# Altium PCB dcdc.PcbDoc
Units mil, origin at the board's own origin, x right, y up, seen from the top; angles counter-clockwise.
Board outline 1910 x 1465 mil, 2 copper layers (Top Layer, Bottom Layer); 30 components, 14 nets, 84 pads, 15 vias.
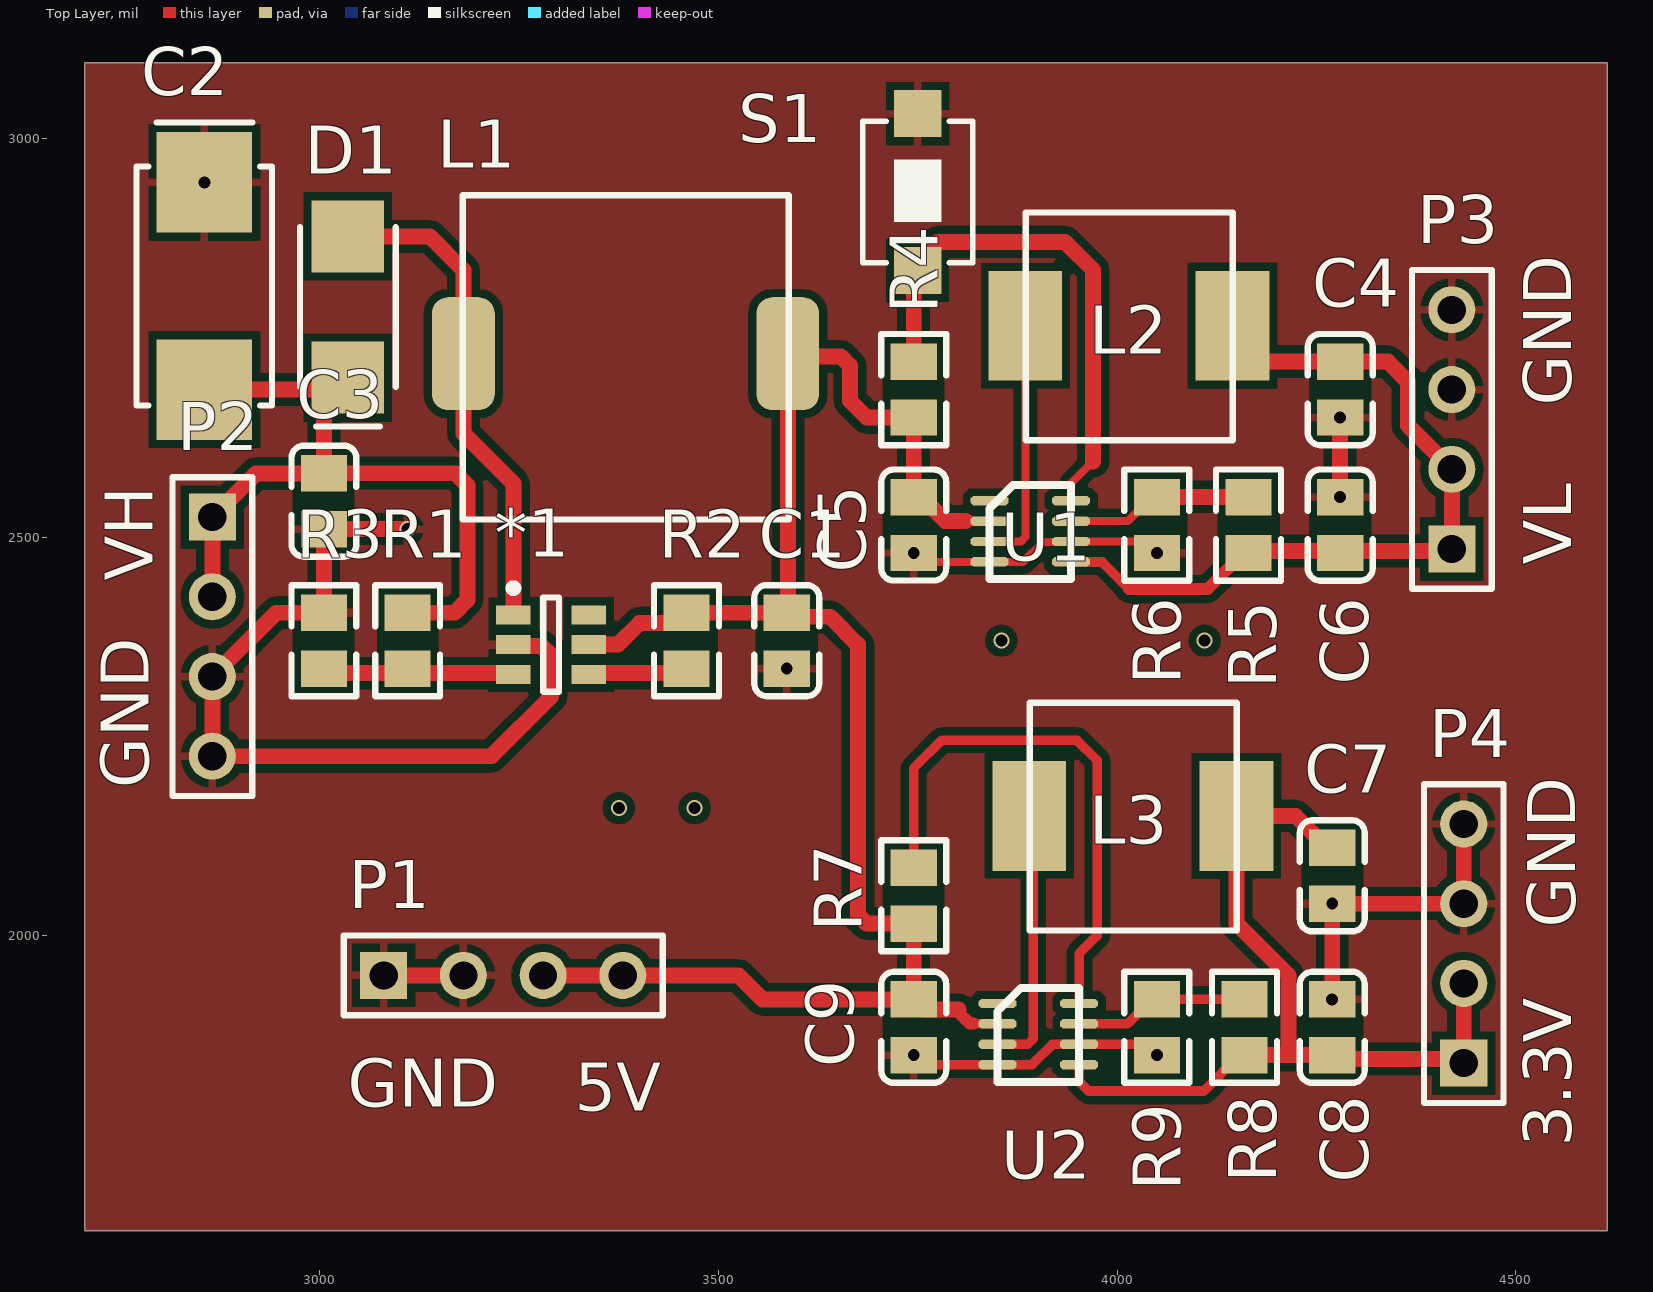
[diagram p0: Top Layer view]
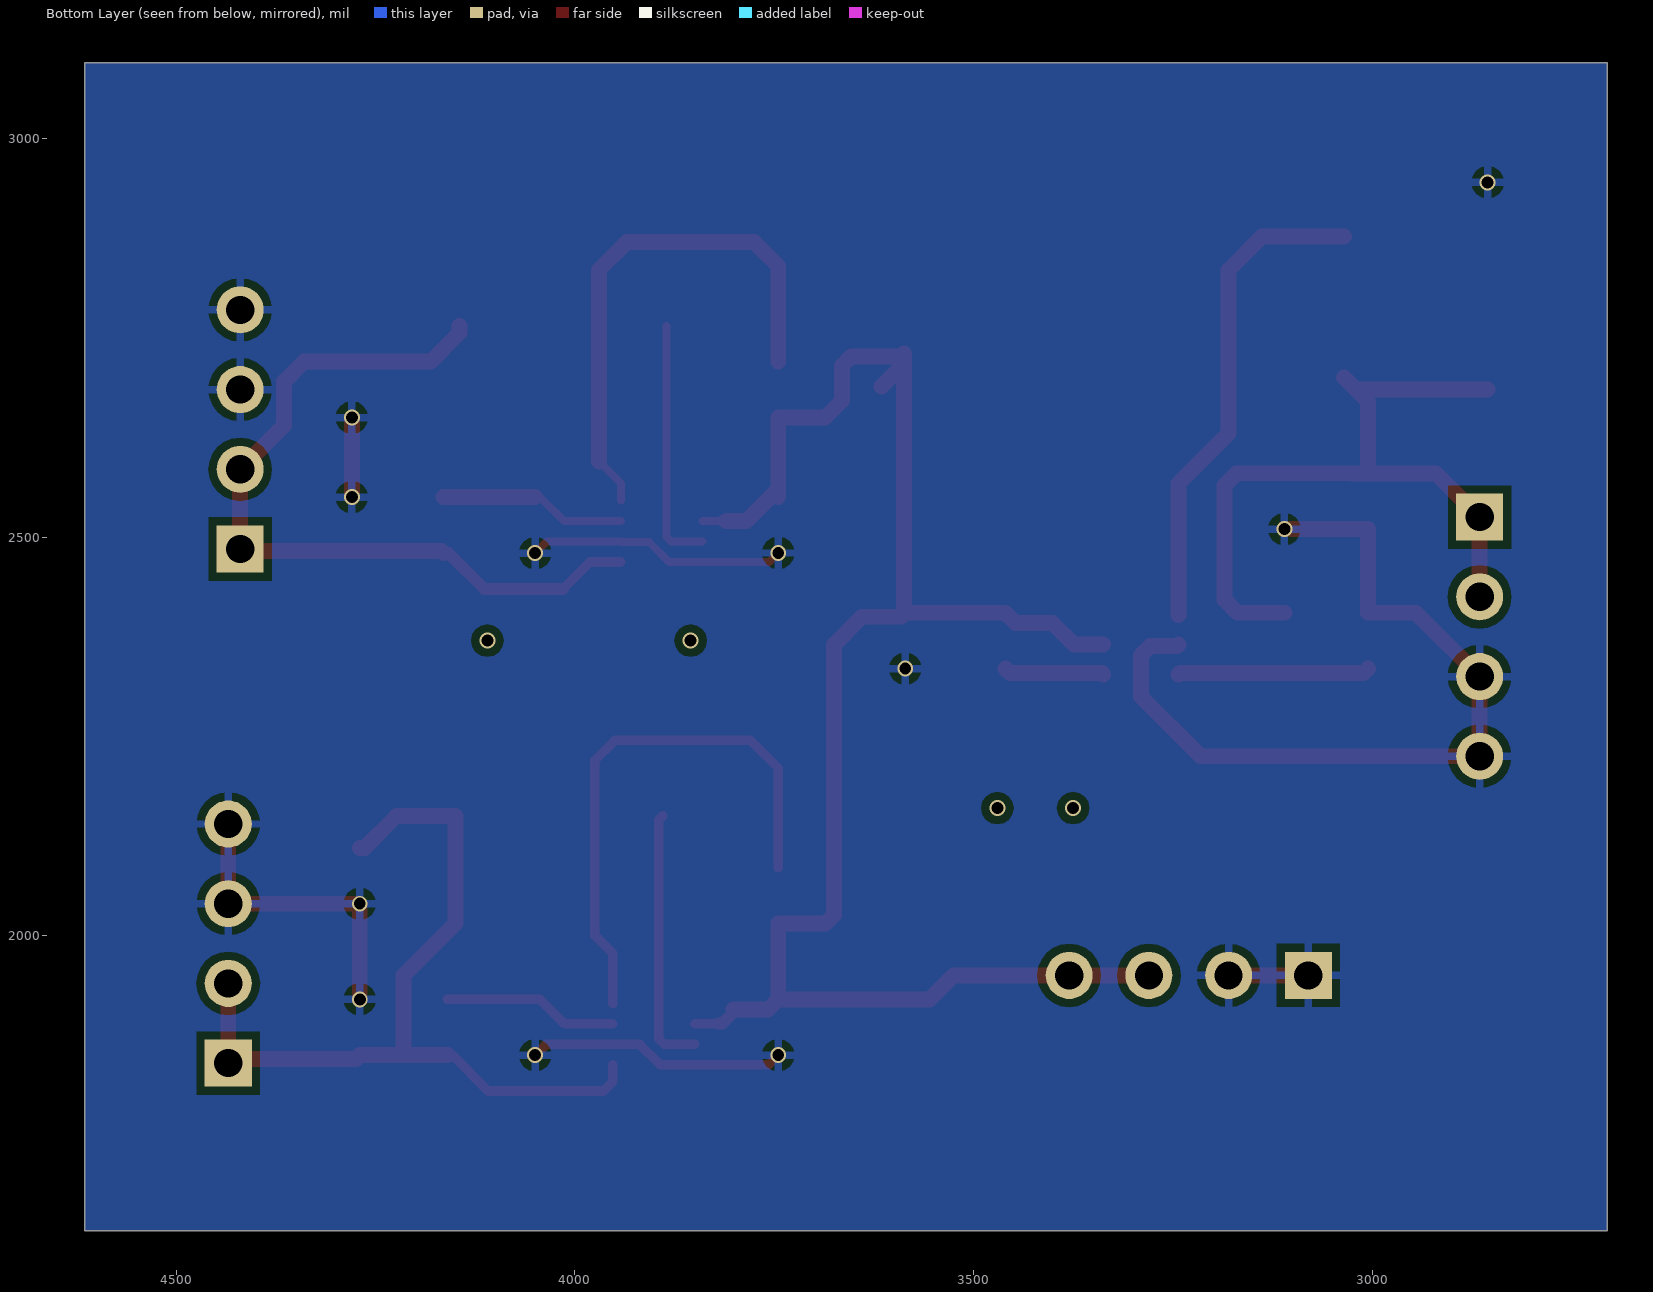
[diagram p1: Bottom Layer view, seen from below]
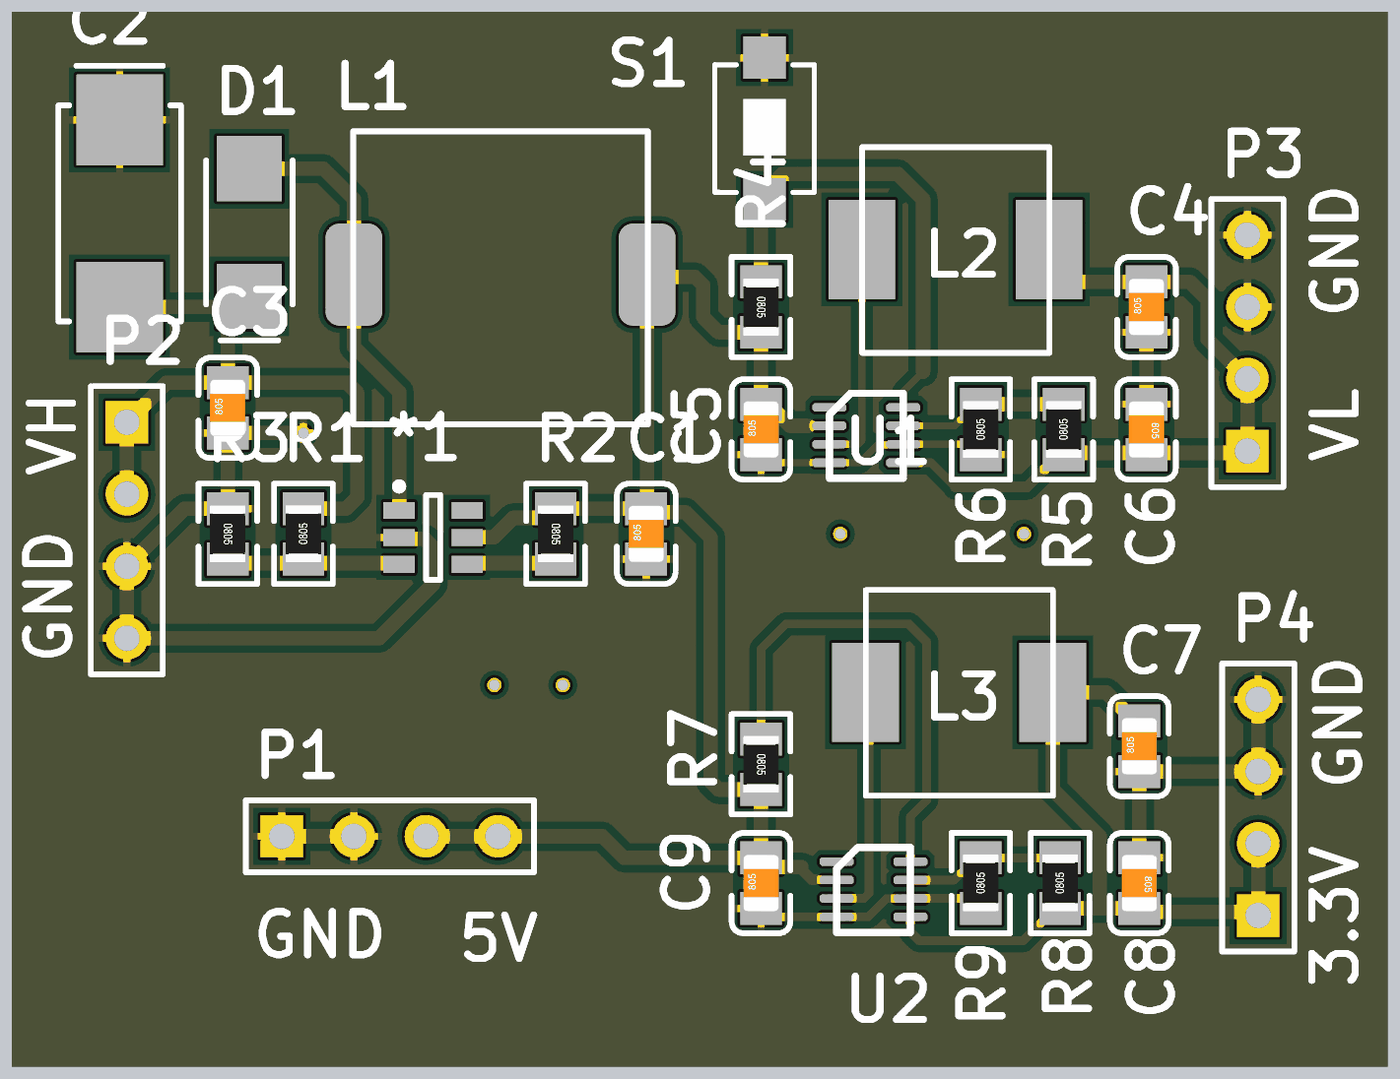
[diagram p2: 3D render of the assembled board from above, using the file's embedded part models]

## Layer stack, top to bottom
Top Solder: solder mask 0.4, Solder Resist, Dk 3.5
Top Layer: signal copper 1.4
Dielectric 1: dielectric 12.6, FR-4, Dk 4.8
Bottom Layer: signal copper 1.4
Bottom Solder: solder mask 0.4, Solder Resist, Dk 3.5

## Board outline
2705,1630 2705,3095 4615,3095 4615,1630

## Design rules (kind name [scope] priority, off if disabled: settings)
Clearance [All] p1: gap=10 ignorepadtopadclearanceinfootprint=FALSE except(0: Arc-Hole Track-Hole SMDPad-Hole THPad-Hole Via-Hole Fill-Hole Poly-Hole Region-Hole Text-Hole)
PolygonConnect [All] p1: connectstyle=Relief reliefconductorwidth=10 reliefentries=4 polygonreliefangle="90 Angle" airgapwidth=10
RoutingVias [All] p1: holewidth=28 width=50 viastyle="Through Hole" minholewidth=28 minwidth=50 maxholewidth=28 maxwidth=50
SolderMaskExpansion [All] p1: expansion=4
Width [All] p1: maxlimit=50 minlimit=10 preferedwidth=10
30 further rules are at their usual default settings.

## Components (designator, comment, footprint, x,y, rotation, side; value= is the part's Value field where it differs from the comment)
*1 "SX1308" SOT23-6 3290,2365 r0 top
C1 "22uF (226)" 0805_C 3585.68,2370 r90 top
C2 "22uF (226)" CAP-7343 2855,2815 r270 top
C3 "15pF/50V" 0805_C 3005,2545 r90 top
C4 "0.1uF" 0805_C 4280,2685 r90 top
C5 "10uF" 0805_C 3745,2515.04 r90 top
C6 "10uF" 0805_C 4280,2515 r270 top
C7 "10uF" 0805_C 4270,2075 r90 top
C8 "0.1uF" 0805_C 4270,1885 r270 top
C9 "10uF" 0805_C 3745,1885 r90 top
D1 "US1M" DIODE-SMA 3035,2877.16 r270 top
L1 "6.8uH" CDRH104R 3588,2929 r270 top
L2 "1uH" 06030 3885.39,2906.73 r0 top
L3 "1uH" 06030 3890.39,2291.73 r0 top
P1 "Header 4" HDR4X1_A 3080,1950 r0 top
P2 "Header 4" HDR4X1_A 2865,2525 r270 top
P3 "Header 4" HDR4X1_A 4420,2485 r90 top
P4 "Header 4" HDR4X1_A 4435,1840 r90 top
R1 "390KΩ" 0805_R 3110,2370 r90 top
R2 "499KΩ" 0805_R 3460,2370 r270 top
R3 "10KΩ" 0805_R 3005,2370 r270 top
R4 "499KΩ" 0805_R 3745,2685 r270 top
R5 "200KΩ" 0805_R 4165,2515 r90 top
R6 "200KΩ" 0805_R 4050,2515 r90 top
R7 "499KΩ" 0805_R 3745,2050 r270 top
R8 "200KΩ" 0805_R 4160,1885 r90 top
R9 "44.2KΩ" 0805_R 4050,1885 r90 top
S1 "SW-PB" SW_PB2_A2 3750,2970 r0 top
U1 "MP2144" TSOT23-8 3840,2545.59 r0 top
U2 "MP2144" TSOT23-8 3850,1914.8 r0 top

## Footprints (in the part's own frame and the unit in brackets; to place one, negate y for a bottom-side part, rotate by r counter-clockwise, add the part's x,y. Pads: shape width x height; smd on the part's side, far side on the other; paste and mask are expansions set on the pad)
0805_C [mm]
  rect 1.16x1.47 smd: 1(-0.89,0) 2(0.89,0)
  silkscreen extent -1.77,-1.04 1.77,1.04, body extent -1,-0.62 1,0.63, height 0.77
0805_R [mm]
  rect 1.16x1.47 smd: 1(-0.89,0) 2(0.89,0)
  silkscreen extent -1.77,-1.04 1.77,1.03, body extent -1,-0.62 1,0.63, height 0.49
06030 [mm]
  rect 2.35x3.5 smd: 1(-0.01,-3.6) 2(6.59,-3.6)
  silkscreen extent 0,-7.25 6.6,0.01, body extent 0,-7.3 6.6,0, height 2
CAP-7343 [mm] "钽电容"
  rect 3.2x3.05 smd: 1(-3.302,0) 2(3.302,0)
  silkscreen extent -5.21,-2.16 3.81,2.16, body extent -3.68,-1.91 3.68,1.91, height 2.95
CDRH104R [mil] "10*10*4 贴片功率电感"
  rrect50% 141.73x78.74 smd: 1(199,-1) 2(199,-408)
  silkscreen extent 0,-409 407,0, body extent -1,-409 409,1, height 189
DIODE-SMA [mm] "贴片二极管"
  rect 2.3x2.3 smd: 1(0,0) 2(4.5,0)
  silkscreen extent -0.29,-1.52 6.06,1.52, body extent -0.67,-1.4 5.17,1.4, height 3
HDR4X1_A [mm] "Connector; Header; 4 Position"
  rect 1.5x1.5 hole 0.9: 1(0,0)
  round 1.5 hole 0.9: 2(2.54,0) 3(5.08,0) 4(7.62,0)
  silkscreen extent -1.27,-1.27 8.89,1.27
SOT23-6 [mm]
  rect 1.1x0.6 smd: 1(-1.2,0.95) 2(-1.2,0) 3(-1.2,-0.95) 4(1.2,-0.95) 5(1.2,0) 6(1.2,0.95)
  silkscreen extent -1.32,-1.5 0.25,1.92, body extent -0.87,-1.5 0.87,1.5, height 1.45
SW_PB2_A2 [mm] "3*4mm按键key龟仔轻触开关"
  rect 1.5x1.5 smd: 1(0,1.556) 2(0,-3.444)
  silkscreen extent -1.75,-3.19 1.75,1.31, body extent -1.75,-3.24 1.75,1.34, height 1.2
TSOT23-8 [mm]
  oct 1.2x0.3 smd: 1(0,0) 2(0,-0.65) 3(0,-1.3) 4(0,-1.95) 5(2.6,-1.95) 6(2.6,-1.3) 7(2.6,-0.65) 8(2.6,0)
  silkscreen extent 0,-2.5 2.6,0.5, body extent 0,-2.5 2.6,0.5, height 1

## Part data
*1: "小体积高效升压电路最高28V"
C1 C2 C3: library part "0805 22uF (226) 20% 25V", "贴片电容", Package=0805, SuppliersPartNumber=C45783, ComponentLink1Description=供应商链接, ComponentLink1URL=http://www.szlcsc.com/product/details_46786.html, Supplier=LC
C4 C5 C6 C7 C8 C9: library part "0805 10uF (106) 10% 25V", "贴片电容", Package=0805, SuppliersPartNumber=C15850, ComponentLink1Description=供应商链接, ComponentLink1URL=http://www.szlcsc.com/product/details_16532.html, Supplier=LC
D1: library part Diode, "二极管", PackageDocument=Sep-1996, Code_JEDEC=DO-214-AB, LatestRevisionDate=17-Jul-2002, LatestRevisionNote="Re-released for DXP Platform.", PackageReference=SMC, Published=8-Jun-2000, Publisher="Altium Limited"
L1 L2 L3: library part Inductor, "电感", Code_IEC=1005, Code_JEITA=0402, LatestRevisionDate=17-Jul-2002, LatestRevisionNote="Re-released for DXP Platform.", PackageReference=0402-A, Published=8-Jun-2000, Publisher="Altium Limited"
P1 P2 P3 P4: "接插件", LatestRevisionDate=17-Jul-2002, LatestRevisionNote="Re-released for DXP Platform.", Publisher="Altium Limited"
R1 R3: library part "0805 1.2KΩ (1201) 1%", "贴片电阻", Package=0805, SuppliersPartNumber=C17379, ComponentLink1Description=供应商链接, ComponentLink1URL=http://www.szlcsc.com/product/details_18067.html, Supplier=LC
R2: library part "0805 100KΩ (1003) 1%", "贴片电阻", Package=0805, SuppliersPartNumber=C17407, ComponentLink1Description=供应商链接, ComponentLink1URL=http://www.szlcsc.com/product/details_18095.html, Supplier=LC
R4 R5 R6 R7 R8 R9: library part "0805 200KΩ (2003) 1%", "贴片电阻", Package=0805, SuppliersPartNumber=C17539, ComponentLink1Description=供应商链接, ComponentLink1URL=http://www.szlcsc.com/product/details_18227.html, Supplier=LC
S1: "微动开关key", LatestRevisionDate=17-Jul-2002, LatestRevisionNote="Re-released for DXP Platform.", PackageReference=SPST-2, Published=24-Mar-1999, Publisher="Altium Limited"
U1 U2: "小体积高效降压 有推荐pcb布局"

## Via types
v1: diameter 20, hole 15, Top Layer to Bottom Layer, 15 vias

## Nets (pads, with @x,y where several pads share a name; then routed paths per layer and width w, separated by ;. In a path a pad name is that pad's centre, name@x,y a point inside that pad or via, vN(x,y) a via of type N, cw(c..) or ccw(c..) an arc to the next point about the centre after c; other vN are vias at no path point)
3.3V: C7.2 C8.2 L3.2 P4.1 P4.2 R8.1 U2.5 | length 1095.1
  Top Layer w12: U2.5 3952.36,1817.03 3964.39,1805 4108.94,1805 4153.9,1849.96 R8.1
  Top Layer w20: R8.1 4215,1849.96 ; C7.2 4263.9,2110.04 4223.94,2150 L3.2 4149.84,2130.16 4150,2130 4150,2015 4215,1950 4215,1849.96 ; P4.2 P4.1 4430.02,1844.98 4274.98,1844.98 C8.2 4215,1849.96
5V: *1.5 C1.2 C5.2 C9.2 L1.1 P1.3 P1.4 R2.1 R4.2 R7.2 U1.2 U2.2 | length 2270.9
  Top Layer w10: 3815,2520 U1.2
  Top Layer w12: 3820,1890 3820.69,1889.31 3849.91,1889.31 U2.2
  Top Layer w15: 3801.02,1907.2 3801.02,1903.98 3815,1890 3820,1890 ; 3810,2520 3815,2520
  Top Layer w20: P1.3 P1.4 3525,1950 3555,1920 C9.2 C9.2 ; *1.5 3373.86,2365 3401.06,2392.2 3447.17,2392.2 R2.1 C1.2 ; L1.1@3615.63,2688.82 L1.1@3587,2717.45 ; C5.2 C5.2@3745,2560.06 ; 3801.02,1907.2 3757.83,1907.2 C9.2 ; 3810,2520 3785.06,2520 C5.2@3745,2560.06 ; C1.2 3590.72,2400 3640,2400 3675,2365 3675,2026.02 3686.06,2014.96 R7.2 C9.2 ; C1.2 3587,2406.35 L1.1@3587,2717.45 ; L1.1@3587,2717.45 L1.1 3590.28,2726.72 3653.28,2726.72 3665,2715 3665,2671.02 3686.06,2649.96 R4.2 C5.2@3745,2560.06
GND: *1.2 C1.1 C2.1 C3.1 C4.1 C5.1 C6.1 C7.1 C8.1 C9.1 P1.1 P1.2 P2.3 P2.4 P3.3 P3.4 P4.3 P4.4 R3.1 R6.1 R9.1 S1.1 U1.4 U1.6 U2.4 U2.6 | length 2280.7
  Top Layer w10: v1(3745,2480) 3756.18,2468.82 U1.4 3882.1,2468.82 3906.81,2493.53 3941.48,2493.53 U1.6 4035.55,2494.41 v1(4050,2479.96)
  Top Layer w12: v1(3745,1849.96) 3756.93,1838.03 U2.4 3893.4,1838.03 3918.89,1863.53 3952.27,1863.53 U2.6 4036.34,1863.62 v1(4050,1849.96)
  Top Layer w20: P1.1 P1.2 ; v1(3110,2509.96) C3.1 R3.1 2945.04,2405.04 P2.3 P2.4 3215,2225 3290,2300 3290,2351.47 3278.28,2363.19 3244.57,2363.19 *1.2 ; v1(4270,1920.04) v1(4270.02,2039.98) ; v1(4270.02,2039.98) P4.3 P4.4 ; v1(4280,2550.04) v1(4280,2649.96)
  other v1: 3585.68,2334.96 2855,2945
Net*1_1: *1.1 D1.1 L1.2 | length 621.1
  Top Layer w20: D1.1 3137.84,2877.16 3180,2835 L1.2 3180,2630 3242.76,2567.24 *1.1
Net*1_3: *1.3 R1.1 R3.2 | length 240.8
  Top Layer w20: R3.2 3010.55,2329.41 3240.94,2329.41 *1.3
Net*1_4: *1.4 R2.2 | length 125.8
  Top Layer w20: *1.4 3339.06,2329.41 3454.45,2329.41 R2.2
NetL2_1: L2.1 U1.3 | length 312.3
  Top Layer w10: U1.3 3879.41,2494.41 3885,2500 L2.1
NetL3_1: L3.1 U2.3 | length 329.3
  Top Layer w12: U2.3 3850.09,1863.72 3887.97,1863.72 3895,1870.75 3895,2145 L3.1
NetR4_1: R4.1 S1.2 U1.8 | length 672.7
  Top Layer w10: U1.8 3942.36,2567.36 3970,2595
  Top Layer w20: R4.1 3745,2814.41 3745,2840 3775,2870 3935,2870 3970,2835 3970,2595
NetR5_2: R5.2 R6.2 U1.7 | length 235.1
  Top Layer w10: U1.7 4013.86,2520 4043.9,2550.04 R6.2
  Top Layer w20: R6.2 R5.2
NetR7_1: R7.1 U2.8 | length 694.4
  Top Layer w12: R7.1 3745,2210 3780,2245 3950,2245 3975,2220 3975,2000 3952.36,1977.36 U2.8
NetR8_2: R8.2 R9.2 U2.7 | length 220.4
  Top Layer w12: U2.7 4013.07,1889.21 4043.9,1920.04 R9.2 R8.2
VH: C2.2 C3.2 D1.2 P2.1 P2.2 R1.2 | length 991.9
  Top Layer w20: C2.2 D1.2@3020,2685 ; P2.2 P2.1 2920,2580 C3.2@3025,2580 ; D1.2 D1.2@3020,2685 ; R1.2 3168.94,2405.04 3185,2421.1 3185,2565 3169.96,2580.04 C3.2 3005,2670 D1.2@3020,2685
VL: C4.2 C6.2 L2.2 P3.1 P3.2 R5.1 U1.5 | length 999.4
  Top Layer w12: U1.5 3942.46,2468.72 3981.28,2468.72 4015,2435
  Top Layer w15: 4015,2435 4113.94,2435 4158.9,2479.96 R5.1
  Top Layer w20: L2.2 4144.84,2756.3 4181.1,2720.04 C4.2 C4.2 4340,2720 4365,2695 4365,2640 P3.2 P3.1 4417.48,2482.48 4167.52,2482.48 R5.1
pads on no net: *1.6 U1.1 U2.1
copper on no net:
  other v1: 3375,2160 3470,2160 3855,2370 4110,2370

## Polygon pours and split planes (outlines as drawn)
GND on Top Layer (solid, pour order 10): 2705,3095 4615,3095 4615,1630 2705,1630
no net on Top Layer (solid, pour order 2): 2475,3235
no net on Top Layer (solid, pour order 0): 2585,3205
GND on Bottom Layer (solid, pour order 12): 2705,1630 2705,3095 4615,3095 4615,1630
no net on Bottom Layer (solid, pour order 6): 2705,1630

## Silkscreen, mask and mechanical layers (free items; w line width, h text height)
Top Overlay:
  text "GND" at 4570,2665 h60 r90
  text "VL" at 4570,2465 h60 r90
  text "VH" at 2790,2445 h60 r90
  text "GND" at 2785,2185 h60 r90
  text "GND" at 4575,2010 h60 r90
  text "GND" at 3035,1785 h60
  text "5V" at 3320,1780 h60
  text "3.3V" at 4570,1735 h60 r90
Mechanical 1:
  the board outline again, w10